# Allegro board dsbssb.brd
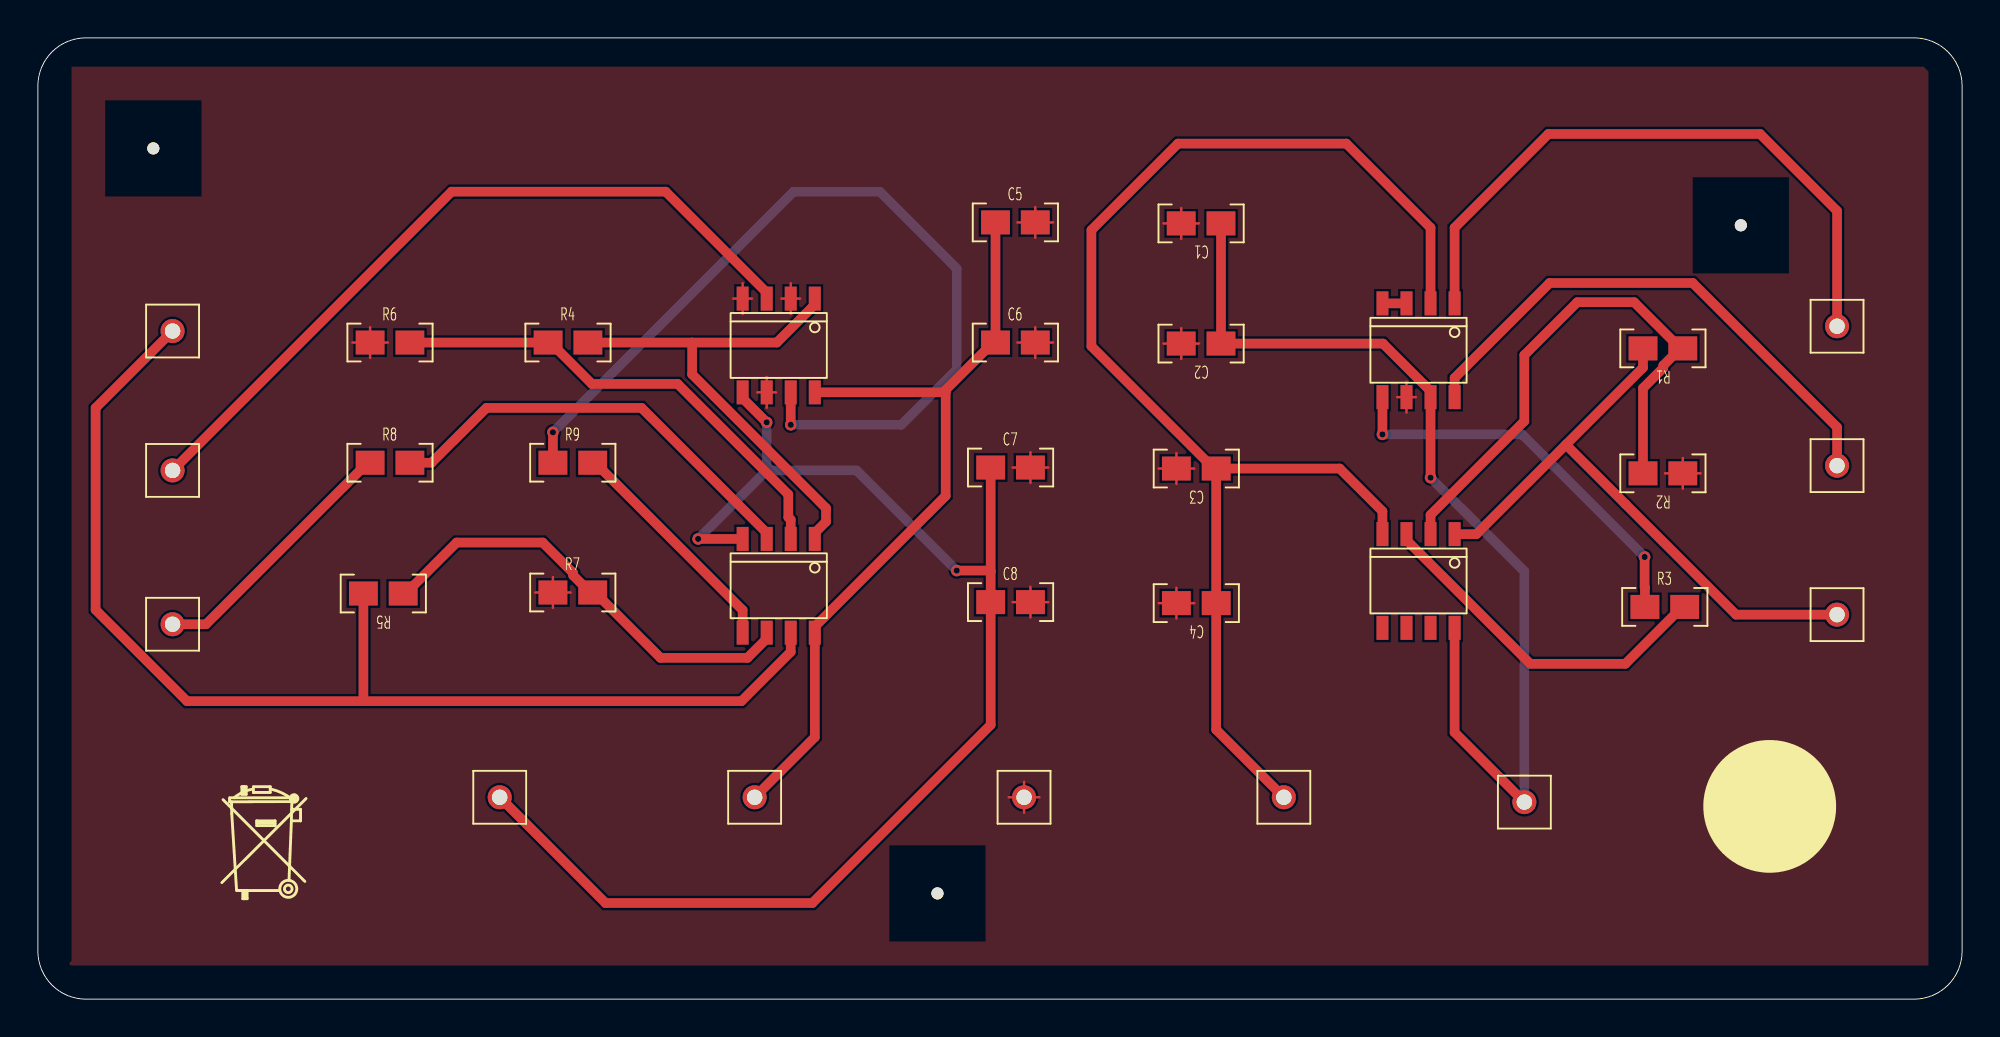
[diagram p0: board, top side]
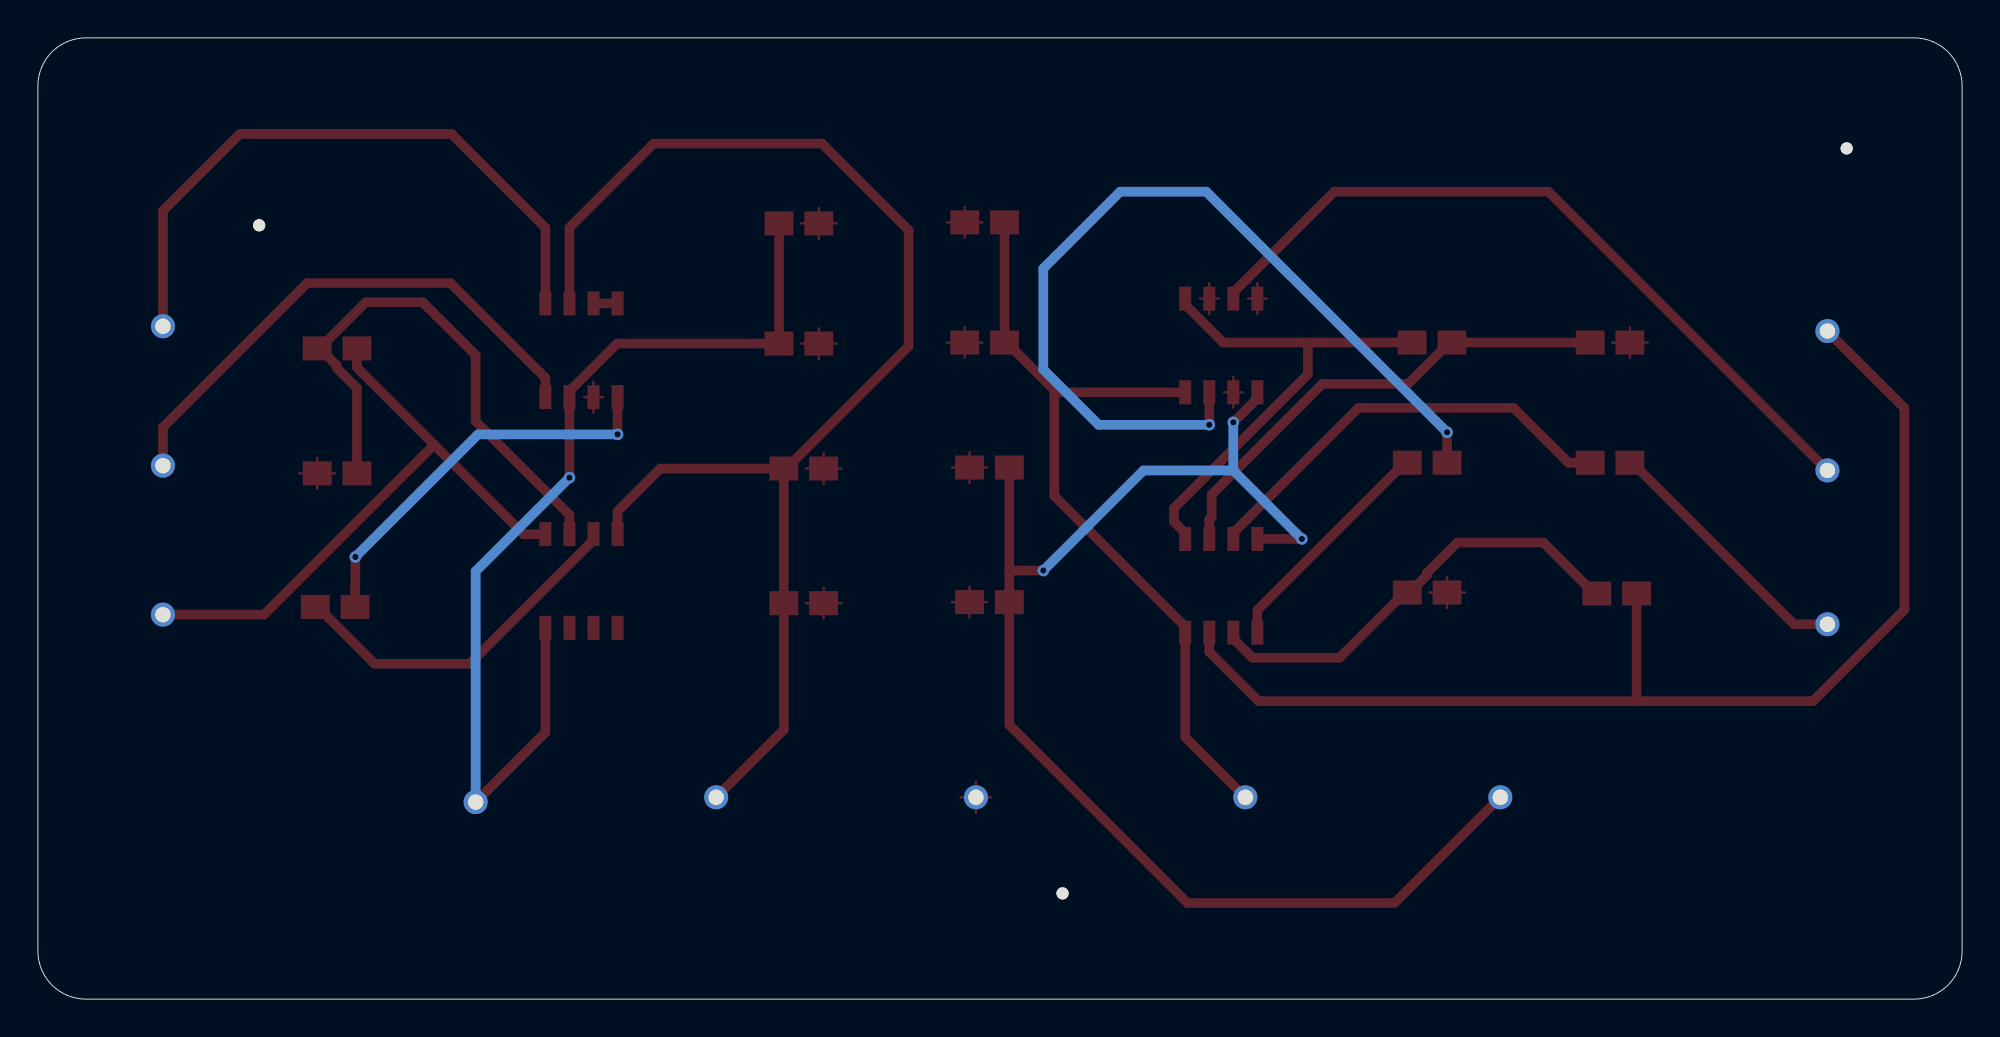
[diagram p1: board, bottom side, seen from below]

Outline 101.6 x 50.8 mm; copper layers: TOP, BOTTOM. Coordinates in mm from the lower left corner of the outline.
Outline path: 0,48.26 arc(0.74,50.06) 2.54,50.8 99.06,50.8 arc(100.86,50.06) 101.6,48.26 101.6,2.54 arc(100.86,0.74) 99.06,0 2.54,0 arc(0.74,0.74) 0,2.54 0,48.26

## Placement (name value [footprint] x y rotation side)
C1  10u  [0805]  61.47 40.89 180 top
C2  0.1u  [0805]  61.47 34.54 180 top
C3  10u  [0805]  61.21 27.94 180 top
C4  0.1u  [0805]  61.21 20.83 180 top
C5  10u  [0805]  51.56 41.15 0 top
C6  0.1u  [0805]  51.56 34.8 0 top
C7  10u  [0805]  51.31 28.19 0 top
C8  0.1u  [0805]  51.31 21.08 0 top
J1  cha  [CHA]  95 35.56 0 top
J2  cha  [CHA]  78.49 10.41 0 top
J3  cha  [CHA]  65.79 10.67 0 top
J4  cha  [CHA]  95 28.19 0 top
J5  cha  [CHA]  95 20.32 0 top
J6  cha  [CHA]  52.07 10.67 0 top
J7  cha  [CHA]  37.85 10.67 0 top
J8  cha  [CHA]  24.38 10.67 0 top
J9  cha  [CHA]  7.11 19.81 0 top
J10  cha  [CHA]  7.11 27.94 0 top
J11  cha  [CHA]  7.11 35.31 0 top
NOREF  -  [unnamed]  6.1 44.96 0 top
NOREF#2  -  [unnamed]  89.92 40.89 0 top
NOREF#3  -  [#2]  14.48 8.38 0 top
NOREF#4  -  [#2]  91.95 10.41 0 top
NOREF#5  -  [unnamed]  47.5 5.59 0 top
R1  9k  [0805]  85.85 34.29 180 top
R2  1k  [0805]  85.85 27.69 180 top
R3  1k  [0805]  85.85 20.83 0 top
R4  4k  [0805]  27.94 34.8 0 top
R5  1k  [0805]  18.29 21.34 180 top
R6  1k  [0805]  18.54 34.8 0 top
R7  1k  [0805]  28.19 21.59 0 top
R8  1k  [0805]  18.54 28.45 0 top
R9  1k  [0805]  28.19 28.45 0 top
U1  MAX291/SO8  [SOIC8]  72.9 34.29 270 top
U2  NE5532  [SOIC8]  72.9 22.1 270 top
U3  NE5532  [SOIC8]  39.12 21.84 270 top
U4  AD633/AD  [SOIC8]  39.12 34.54 270 top

## Library data of the parts
C1-C8 = C
J1-J11 = cha
R1-R9 = R
U1 = MAX291/SO8: Tolerance: ***; User Part Number: ***
U2 U3 = NE5532: Tolerance: ***; User Part Number: ***
U4 = AD633/AD: Tolerance: ***; User Part Number: ***

## Footprints (pads in the part's own frame, mm; a bottom-side part is the same pattern mirrored in y, then rotated)
0805
  rect 1.524x1.27 smd: 1(-1,-0.1) 2(1.1,-0.1)
CHA
  round 1.27 hole 0.813: 1(0,0)
SOIC8
  rect 1.27x0.635 smd: 1(-2.477,1.905) 2(-2.477,0.635) 3(-2.477,-0.635) 4(-2.477,-1.905) 5(2.477,-1.905) 6(2.477,-0.635) 7(2.477,0.635) 8(2.477,1.905)
unnamed
  round 0.635 hole 3.175 unplated: (0,0)

## Nets
GND: C1.2 C2.2 C3.2 C4.2 C5.2 C6.2 C7.2 C8.2 J6.1 R2.1 R6.1 R7.1 U1.6 U4.2(X2) U4.4(Y2) U4.6(Z)
V1+: C1.1 C2.1 J2.1 U1.7(V+) U2.8(V+)
V1-: C3.1 C4.1 J3.1 U1.2(V-) U2.4(V-)
V2+: C5.1 C6.1 J7.1 U3.8(V+) U4.8(V+)
V2-: C7.1 C8.1 J8.1 U3.4(V-) U4.5(V-)
AD_OUT: R9.1 U4.7(W)
CARRIER: J10.1 U4.3(Y1)
CLK: J1.1 U1.1(CLK)
FILTER_IN: J4.1 U1.8(IN)
FILTER_OUT: R3.1 U1.5(OUT)
MULTIPLE_OUT: J11.1 R5.2 U3.7(OUT)
OUT: J5.1 R1.2 U2.1(OUT)
SOURCE: J9.1 R8.1
SOURCE_OUT: R4.2 U3.1(OUT) U4.1(X1)
N00266: U1.3(OPOUT) U1.4(OPIN-)
N00997: R3.2 U2.3(+IN)
N01001: R1.1 R2.2 U2.2(-IN)
N02880: R8.2 U3.3(+IN)
N02884: R4.1 R6.2 U3.2(-IN)
N03362: R9.2 U3.5(+IN)
N03366: R5.1 R7.2 U3.6(-IN)

Pads without a net: U2 5 6 7

## Via types
v1: diameter 0.61, hole 0.33, TOP to BOTTOM, 8 vias

## Routing (per net, layer and track width the routed paths; a pad name or vN(x,y) marks a point on that pad's centre or on a via; arc(x,y) is an arc through that point)
GND: length 52.3
  TOP w0.127: U4.2 40.25,37.02 ; U4.2 39.75,37.83 ; U4.2 39.75,36.21 ; U4.2 39.26,37.02 ; 52.41,27.28 C7.2 ; C7.2 51.47,28.09 ; C7.2 52.41,28.91 ; C7.2 53.35,28.09 ; C8.2 53.35,20.98 ; C8.2 52.41,20.17 ; C8.2 52.41,21.79 ; C8.2 51.47,20.98 ; 60.37,40.18 C1.2 ; C1.2 59.43,40.99 ; C1.2 61.31,40.99 ; C1.2 60.37,41.81 ; 52.07,9.86 J6.1 ; J6.1 52.07,11.48 ; J6.1 52.88,10.67 ; J6.1 51.26,10.67 ; R6.1 18.48,34.7 ; R6.1 16.6,34.7 ; R6.1 17.54,33.89 ; R6.1 17.54,35.51 ; 71.77,31.81 72.26,31.81 ; 72.26,31.81 72.76,31.81 ; 72.26,31.81 72.26,32.63 ; 72.26,31.81 72.26,31 ; C2.2 60.37,35.46 ; C2.2 59.43,34.64 ; C2.2 61.31,34.64 ; C2.2 60.37,33.83 ; C6.2 52.66,35.51 ; C6.2 52.66,33.89 ; C6.2 51.72,34.7 ; C6.2 53.6,34.7 ; C5.2 52.66,41.86 ; C5.2 53.6,41.05 ; C5.2 52.66,40.24 ; C5.2 51.72,41.05 ; 27.19,20.68 R7.1 ; R7.1 26.25,21.49 ; R7.1 28.13,21.49 ; R7.1 27.19,22.3 ; 38.48,31.25 38.48,32.07 ; 38.48,32.07 37.99,32.07 ; 38.48,32.07 38.48,32.88 ; 38.48,32.07 38.98,32.07 ; C3.2 61.05,28.04 ; C3.2 59.17,28.04 ; C3.2 60.11,28.85 ; C3.2 60.11,27.23 ; C4.2 61.05,20.93 ; C4.2 60.11,21.74 ; C4.2 59.17,20.93 ; C4.2 60.11,20.12 ; U4.4 37.71,37.02 ; U4.4 36.72,37.02 ; U4.4 37.21,37.83 ; U4.4 37.21,36.21 ; R2.1 86.85,28.6 ; R2.1 87.79,27.79 ; R2.1 86.85,26.97 ; R2.1 85.91,27.79
V1+: length 53
  TOP w0.508: J2.1 74.8,14.1 U2.8 ; v1(73.53,27.56) U1.7 73.53,32.13 71.02,34.64 C2.1 C1.1
  BOTTOM w0.508: J2.1 78.49,22.61 v1(73.53,27.56)
V1-: length 70.8
  TOP w0.508: C3.1 C4.1 62.21,14.24 J3.1 ; C3.1 68.73,28.04 70.99,25.78 U2.4 ; C3.1 62.09,28.04 55.63,34.5 55.63,40.64 60.2,45.21 69.09,45.21 73.53,40.77 U1.2
V2+: length 42.6
  TOP w0.508: C5.1 C6.1 50.44,34.7 47.93,32.19 47.93,32.07 ; 47.93,32.07 U4.8 ; 47.93,32.07 47.93,26.6 41.02,19.68 U3.8 41.02,13.84 J7.1
V2-: length 71.9
  TOP w0.508: v1(38.48,30.48) 37.21,31.75 U4.5 ; 50.31,22.61 C8.1 50.31,14.49 40.89,5.08 29.97,5.08 J8.1 ; 50.31,22.61 C7.1 ; 50.31,22.61 50.27,22.65 v1(48.51,22.65) ; U3.4 v1(34.86,24.32)
  BOTTOM w0.508: 38.61,27.94 38.48,27.94 v1(34.86,24.32) ; 38.61,27.94 43.22,27.94 v1(48.51,22.65) ; 38.61,27.94 38.48,28.07 v1(38.48,30.48)
AD_OUT: length 46.9
  TOP w0.508: R9.1 v1(27.19,29.96) ; U4.7 v1(39.75,30.35)
  BOTTOM w0.508: v1(27.19,29.96) 39.91,42.67 44.45,42.67 48.51,38.61 48.51,33.27 45.59,30.35 v1(39.75,30.35)
CARRIER: length 40
  TOP w0.508: 38.48,37.02 38.48,37.34 33.15,42.67 21.84,42.67 J10.1
CLK: length 34
  TOP w0.508: J1.1 95,41.66 90.93,45.72 79.76,45.72 74.8,40.77 U1.1
FILTER_IN: length 28.5
  TOP w0.508: J4.1 95,30.23 87.38,37.85 79.82,37.85 74.8,32.83 U1.8
FILTER_OUT: length 21.1
  TOP w0.508: R3.1 84.85,21.74 84.84,21.76 v1(84.84,23.37) ; U1.5 v1(70.99,29.84)
  BOTTOM w0.508: v1(70.99,29.84) 78.36,29.84 v1(84.84,23.37)
MULTIPLE_OUT: length 62.9
  TOP w0.508: 17.27,15.75 17.19,15.83 R5.2 ; 17.27,15.75 37.15,15.75 39.75,18.35 U3.7 ; 17.27,15.75 7.87,15.75 3.05,20.57 3.05,31.24 J11.1
OUT: length 32.6
  TOP w0.508: 80.68,29.3 83.82,26.16 89.66,20.32 J5.1 ; 80.68,29.3 84.75,33.37 R1.2 ; 80.68,29.3 75.95,24.57 U2.1
SOURCE: length 14
  TOP w0.508: J9.1 8.88,19.81 17.42,28.35 R8.1
SOURCE_OUT: length 26.7
  TOP w0.508: U4.1 41.02,36.7 39.02,34.7 34.54,34.7 ; U3.1 41.02,24.64 41.61,25.23 41.61,25.95 34.54,33.02 34.54,34.7 ; 34.54,34.7 R4.2
N00266: length 1.3
  TOP w0.508: U1.4 72.26,36.77
N00997: length 19
  TOP w0.508: 72.26,24.57 72.26,24.26 78.8,17.72 83.82,17.72 86.83,20.73 R3.2
N01001: length 29.5
  TOP w0.508: 86.72,34.39 84.29,36.83 81.28,36.83 78.49,34.04 78.49,30.54 73.53,25.59 U2.2 ; 86.72,34.39 85.82,33.49 85.82,33.36 84.75,32.29 R2.2 ; 86.72,34.39 R1.1
N02880: length 23.1
  TOP w0.508: R8.2 20.79,28.35 23.68,31.24 31.88,31.24 38.48,24.64 38.48,24.32
N02884: length 25.7
  TOP w0.508: R6.2 R4.1 27.07,34.7 29.25,32.51 33.78,32.51 39.62,26.67 39.62,25.46 39.75,25.34 U3.2
N03362: length 12.3
  TOP w0.508: R9.2 29.42,28.35 37.21,20.56 U3.5
N03366: length 23.6
  TOP w0.508: R5.1 19.41,21.44 22.11,24.13 26.65,24.13 28.26,22.52 28.26,22.39 29.17,21.49 R7.2 29.42,21.49 32.88,18.03 37.46,18.03 38.48,19.05 38.48,19.37

## Copper pours and planes (outline as drawn; the poured copper is in the pictures)
GND on TOP: 1.78,49.28 1.78,2.03 1.52,1.78 99.82,1.78 99.82,49.02 99.57,49.28
